# Allegro board RINGCOUNTER_EXAM.brd
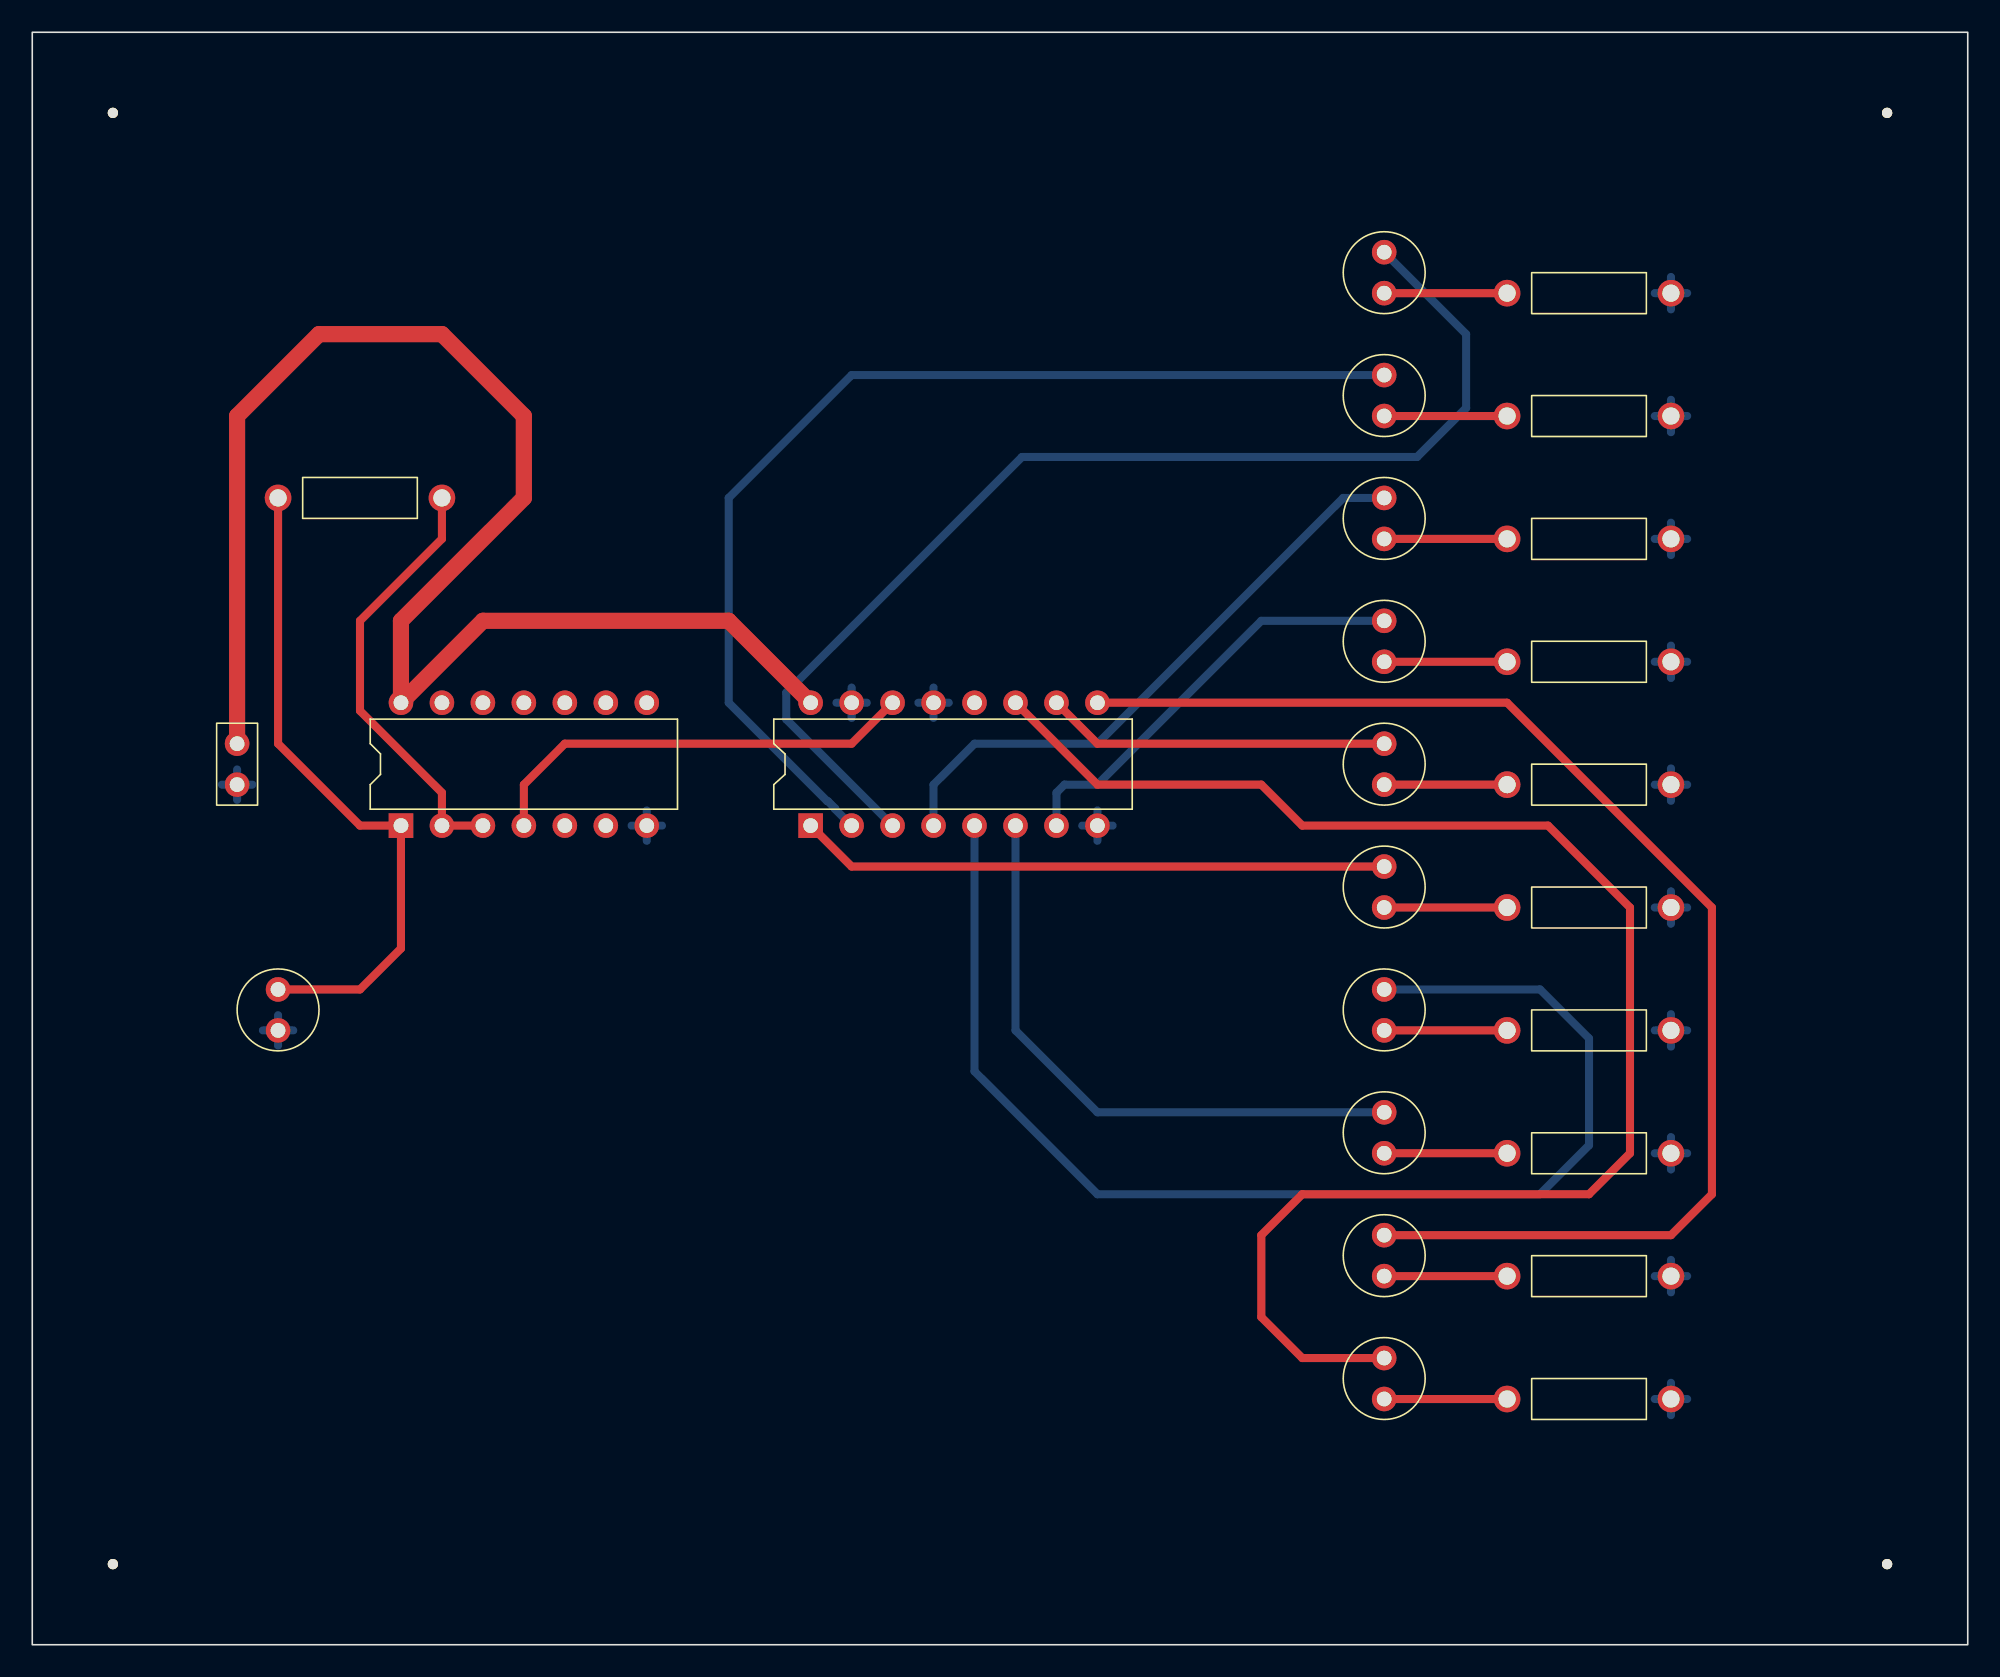
[diagram p0: board, top side]
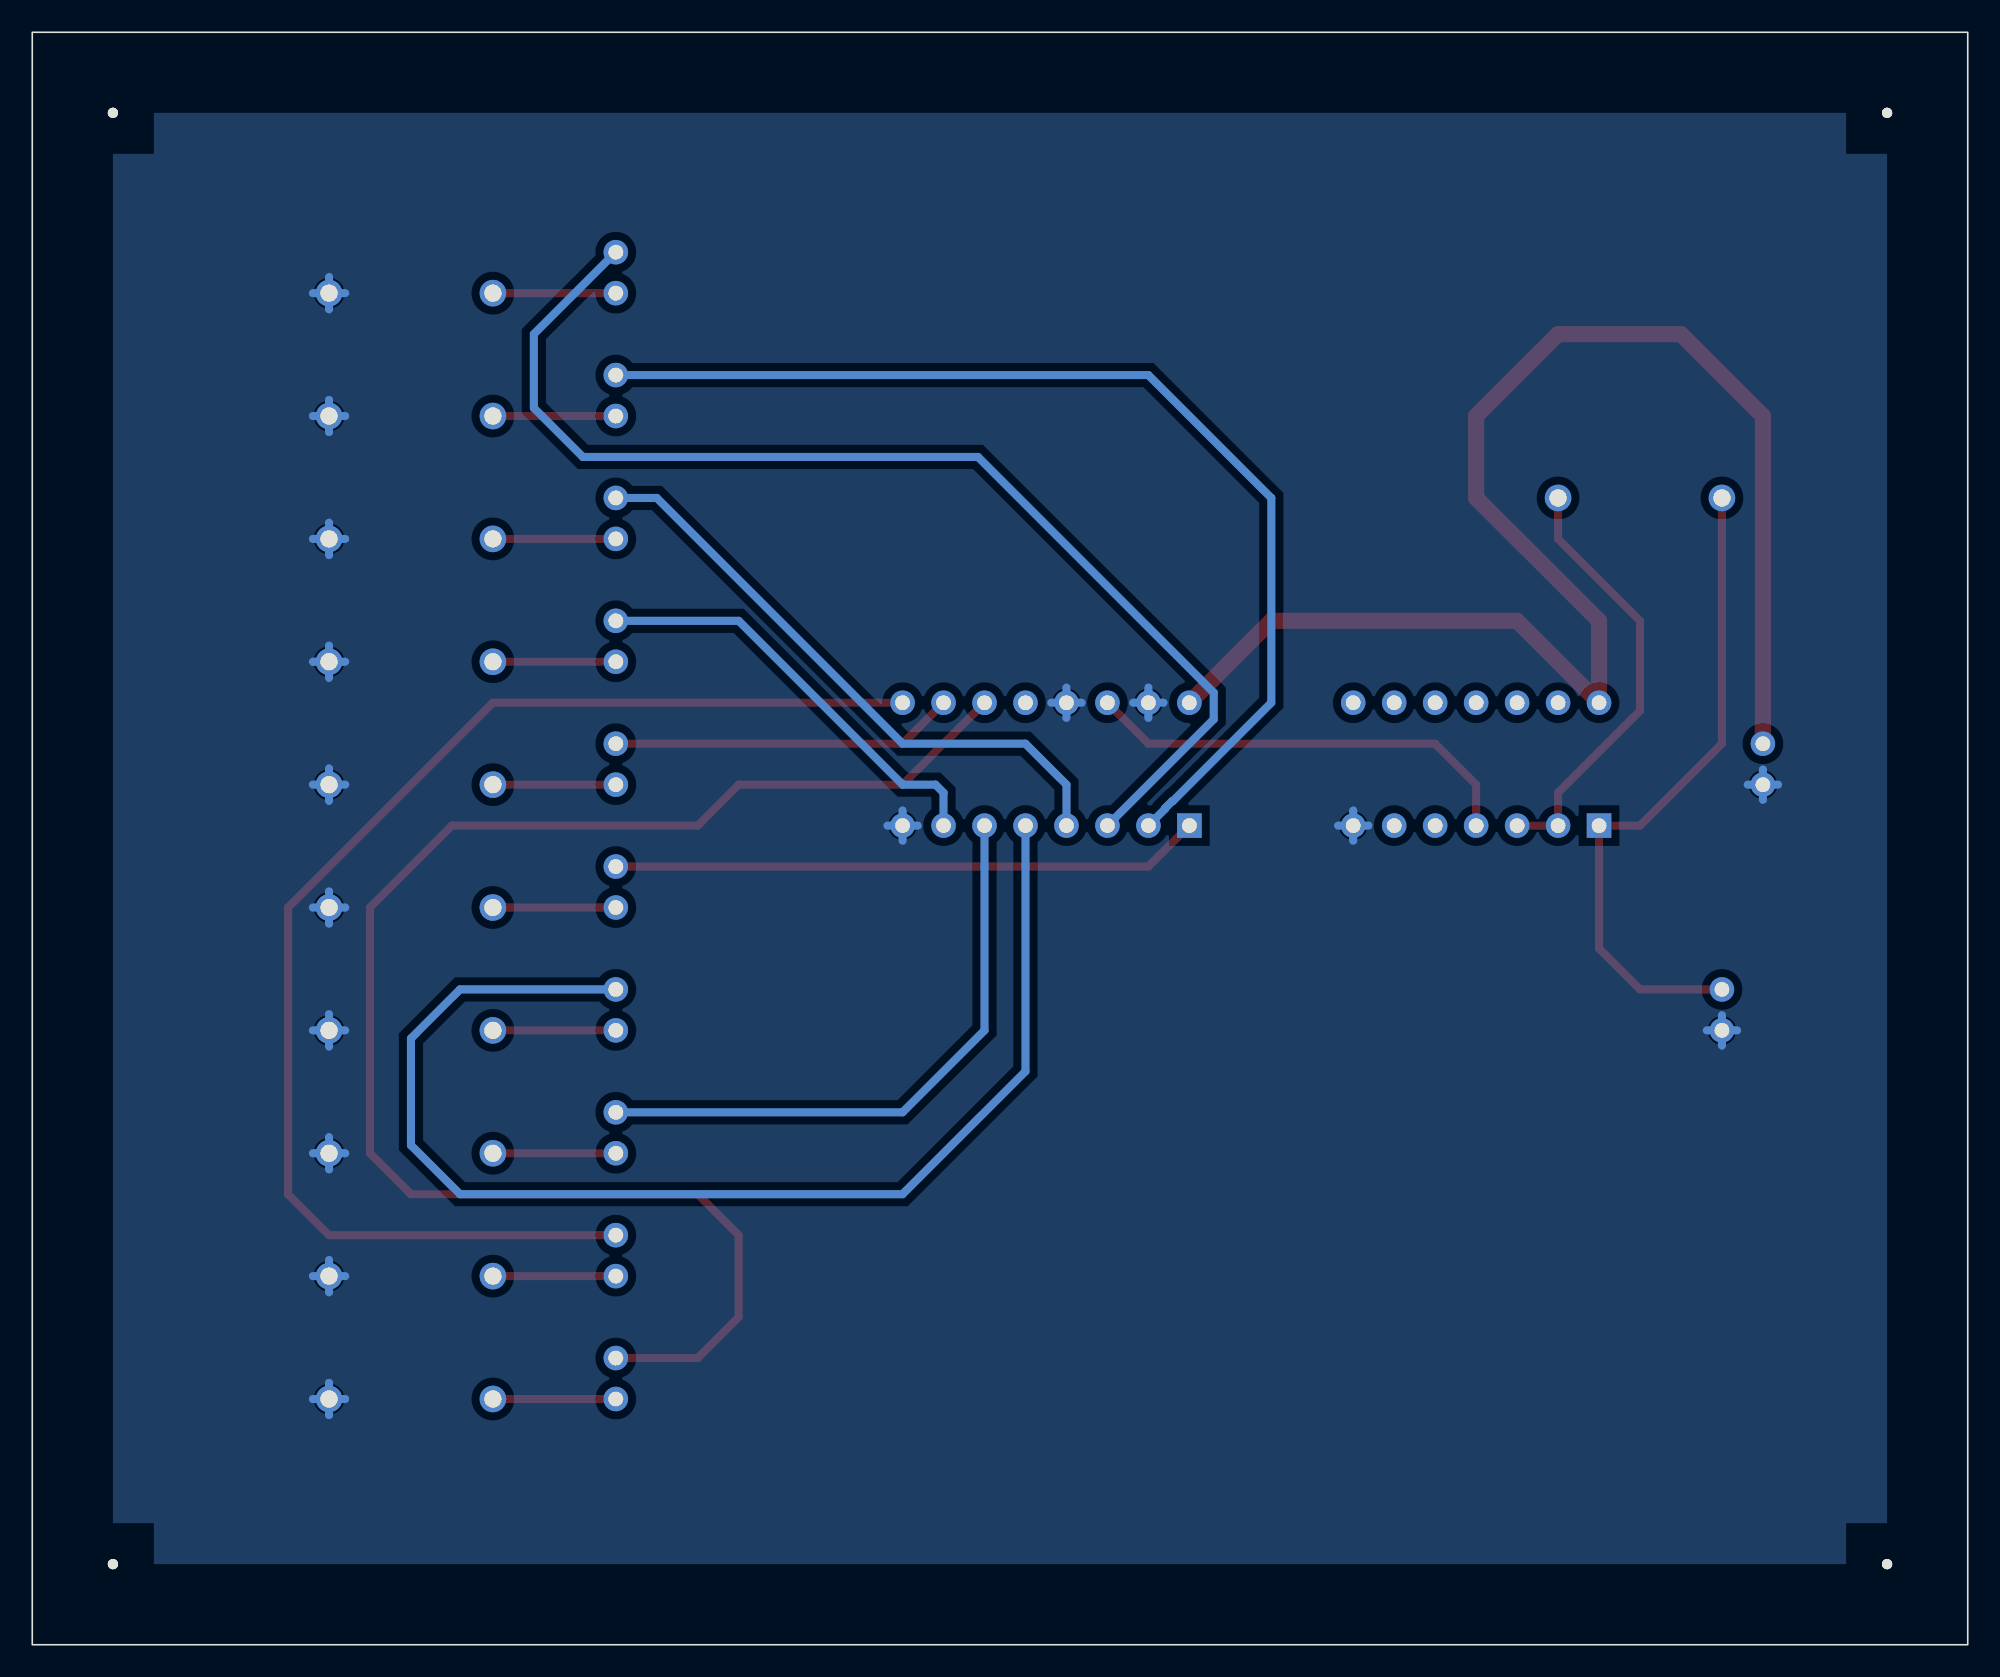
[diagram p1: board, bottom side, seen from below]

Outline 120 x 100 mm; copper layers: TOP, BOTTOM. Coordinates in mm from the lower left corner of the outline.
Outline path: rectangle 0,0 120,100

## Design rules (mm)
nets with their own width: min track width 1; nets GND VCC

## Placement (name value [footprint] x y rotation side)
C1  10u  [CAP196]  15.24 40.64 180 top
D1  LED  [CAP196]  83.82 83.82 0 top
D2  LED  [CAP196]  83.82 76.2 0 top
D3  LED  [CAP196]  83.82 68.58 0 top
D4  LED  [CAP196]  83.82 60.96 0 top
D5  LED  [CAP196]  83.82 53.34 0 top
D6  LED  [CAP196]  83.82 45.72 0 top
D7  LED  [CAP196]  83.82 38.1 0 top
D8  LED  [CAP196]  83.82 30.48 0 top
D9  LED  [CAP196]  83.82 22.86 0 top
D10  LED  [CAP196]  83.82 15.24 0 top
J1  CON2  [JUMPER2]  12.7 55.88 270 top
NOREF  -  []  2 2 90 top
NOREF#2  -  []  0 0 0 top
NOREF#3  -  []  2 98 0 top
NOREF#4  -  [unnamed#2]  5 95 0 top
NOREF#5  -  [unnamed#2]  115 95 0 top
NOREF#6  -  [unnamed#2]  115 5 0 top
NOREF#7  -  []  0 0 90 top
NOREF#8  -  [unnamed#2]  5 5 0 top
R1  220  [RES400]  91.44 83.82 270 top
R2  220  [RES400]  91.44 76.2 270 top
R3  200k  [RES400]  15.24 71.12 270 top
R4  220  [RES400]  91.44 68.58 270 top
R5  220  [RES400]  91.44 60.96 270 top
R6  220  [RES400]  91.44 53.34 270 top
R7  220  [RES400]  91.44 45.72 270 top
R8  220  [RES400]  91.44 38.1 270 top
R9  220  [RES400]  91.44 30.48 270 top
R10  220  [RES400]  91.44 22.86 270 top
R11  220  [RES400]  91.44 15.24 270 top
U1  74HC14  [DIP14_3]  22.86 50.8 90 top
U2  4017  [DIP16_3]  48.26 50.8 90 top

## Library data of the parts
C1 = CAP: Tolerance: ***; User Part Number: ***
D1-D10 = LED: Tolerance: ***; User Part Number: ***
J1 = CON2: User Part Number: ***
R1-R11 = R: Tolerance: ***; User Part Number: ***
U1 = 74HC14: Tolerance: ***; User Part Number: ***
U2 = 4017_0: Tolerance: ***; User Part Number: ***

## Footprints (pads in the part's own frame, mm; a bottom-side part is the same pattern mirrored in y, then rotated)
CAP196
  round 1.524 hole 0.914: 1(0,0) 2(0,2.54)
DIP14_3
  rect 1.524x1.524 hole 0.914: 1(0,0)
  round 1.524 hole 0.914: 2(0,-2.54) 3(0,-5.08) 4(0,-7.62) 5(0,-10.16) 6(0,-12.7) 7(0,-15.24) 8(7.62,-15.24) 9(7.62,-12.7) 10(7.62,-10.16) 11(7.62,-7.62) 12(7.62,-5.08) 13(7.62,-2.54) 14(7.62,0)
DIP16_3
  rect 1.524x1.524 hole 0.914: 1(0,0)
  round 1.524 hole 0.914: 2(0,-2.54) 3(0,-5.08) 4(0,-7.62) 5(0,-10.16) 6(0,-12.7) 7(0,-15.24) 8(0,-17.78) 9(7.62,-17.78) 10(7.62,-15.24) 11(7.62,-12.7) 12(7.62,-10.16) 13(7.62,-7.62) 14(7.62,-5.08) 15(7.62,-2.54) 16(7.62,0)
JUMPER2
  round 1.524 hole 0.914: 1(0,0) 2(2.54,0)
RES400
  round 1.651 hole 1.067: 1(0,0) 2(0,10.16)
unnamed#2
  round 0.635 hole 3.175 unplated: (0,0)

## Nets
GND: C1.2 J1.2 R1.2 R2.2 R4.2 R5.2 R6.2 R7.2 R8.2 R9.2 R10.2 R11.2 U1.7 U2.8(GND) U2.13(E\N\A\) U2.15(RST)
VCC: J1.1 U1.14 U2.16(VCC)
N01217: C1.1 R3.1 U1.1(A)
N01238: R3.2 U1.2(Y) U1.3(A)
N01257: U1.4(Y) U2.14(CLK)
N01261: D1.2(ANODE) U2.3(Q0)
N01273: D2.2(ANODE) U2.2(Q1)
N01285: D3.2(ANODE) U2.4(Q2)
N01297: D4.2(ANODE) U2.7(Q3)
N01309: D10.2(ANODE) U2.11(Q9)
N01321: D9.2(ANODE) U2.9(Q8)
N01333: D8.2(ANODE) U2.6(Q7)
N01345: D7.2(ANODE) U2.5(Q6)
N01357: D6.2(ANODE) U2.1(Q5)
N01369: D5.2(ANODE) U2.10(Q4)
N01464: D1.1(CATHODE) R1.1
N01468: D2.1(CATHODE) R2.1
N01472: D3.1(CATHODE) R4.1
N01476: D4.1(CATHODE) R5.1
N01480: D5.1(CATHODE) R6.1
N01484: D6.1(CATHODE) R7.1
N01488: D7.1(CATHODE) R8.1
N01492: D8.1(CATHODE) R9.1
N01503: D9.1(CATHODE) R10.1
N01507: D10.1(CATHODE) R11.1

Pads without a net: U1 5 6 8 9 10 11 12 13; U2 12

## Routing (per net, layer and track width the routed paths; a pad name or vN(x,y) marks a point on that pad's centre or on a via; arc(x,y) is an arc through that point)
GND: length 62.7
  BOTTOM w0.5: 101.6,82.82 R1.2 ; R1.2 101.6,84.82 ; R1.2 102.6,83.82 ; R1.2 100.6,83.82 ; R7.2 101.6,46.72 ; R7.2 102.6,45.72 ; R7.2 101.6,44.72 ; R7.2 100.6,45.72 ; 50.8,57.48 U2.15 ; U2.15 49.86,58.42 ; U2.15 50.8,59.36 ; U2.15 51.74,58.42 ; 101.6,52.34 R6.2 ; R6.2 100.6,53.34 ; R6.2 101.6,54.34 ; R6.2 102.6,53.34 ; 101.6,29.48 R9.2 ; R9.2 101.6,31.48 ; R9.2 100.6,30.48 ; R9.2 102.6,30.48 ; R10.2 102.6,22.86 ; R10.2 100.6,22.86 ; R10.2 101.6,23.86 ; R10.2 101.6,21.86 ; R2.2 102.6,76.2 ; R2.2 101.6,77.2 ; R2.2 101.6,75.2 ; R2.2 100.6,76.2 ; J1.2 12.7,54.28 ; J1.2 12.7,52.4 ; J1.2 13.64,53.34 ; J1.2 11.76,53.34 ; R4.2 101.6,69.58 ; R4.2 102.6,68.58 ; R4.2 100.6,68.58 ; R4.2 101.6,67.58 ; R5.2 101.6,61.96 ; R5.2 102.6,60.96 ; R5.2 100.6,60.96 ; R5.2 101.6,59.96 ; 38.1,49.86 U1.7 ; U1.7 39.04,50.8 ; U1.7 38.1,51.74 ; U1.7 37.16,50.8 ; R8.2 102.6,38.1 ; R8.2 100.6,38.1 ; R8.2 101.6,37.1 ; R8.2 101.6,39.1 ; 54.94,58.42 U2.13 ; U2.13 55.88,57.48 ; U2.13 56.82,58.42 ; U2.13 55.88,59.36 ; 15.24,37.16 C1.2 ; C1.2 16.18,38.1 ; C1.2 15.24,39.04 ; C1.2 14.3,38.1 ; R11.2 102.6,15.24 ; R11.2 100.6,15.24 ; R11.2 101.6,14.24 ; R11.2 101.6,16.24 ; U2.8 66.04,51.74 ; U2.8 66.04,49.86 ; U2.8 66.98,50.8 ; U2.8 65.1,50.8
VCC: length 92.9
  TOP w1: J1.1 12.7,76.2 17.78,81.28 25.4,81.28 30.48,76.2 30.48,71.12 22.86,63.5 U1.14 27.94,63.5 43.18,63.5 U2.16
N01217: length 41.3
  TOP w0.5: C1.1 20.32,40.64 22.86,43.18 U1.1 20.32,50.8 15.24,55.88 R3.1
N01238: length 27.1
  TOP w0.5: R3.2 25.4,68.58 20.32,63.5 20.32,57.92 25.4,52.84 U1.2 U1.3
N01257: length 27.5
  TOP w0.5: U2.14 50.8,55.88 33.02,55.88 30.48,53.34 U1.4
N01261: length 72.2
  BOTTOM w0.5: D1.2 88.9,81.28 88.9,76.7 85.86,73.66 61.36,73.66 46.75,59.05 46.75,57.39 U2.3
N01273: length 67.3
  BOTTOM w0.5: U2.2 49.77,51.83 49.77,51.87 49.33,52.31 49.29,52.31 43.18,58.42 43.18,71.12 50.8,78.74 D2.2
N01285: length 37.8
  BOTTOM w0.5: U2.4 55.88,53.34 58.42,55.88 66.04,55.88 81.28,71.12 D3.2
N01297: length 26.8
  BOTTOM w0.5: D4.2 76.2,63.5 66.04,53.34 64,53.34 63.5,52.84 U2.7
N01309: length 97.3
  TOP w0.5: U2.11 66.04,53.34 76.2,53.34 78.74,50.8 93.98,50.8 99.06,45.72 99.06,30.48 96.52,27.94 78.74,27.94 76.2,25.4 76.2,20.32 78.74,17.78 D10.2
N01321: length 82.5
  TOP w0.5: D9.2 101.6,25.4 104.14,27.94 104.14,45.72 91.44,58.42 U2.9
N01333: length 37.7
  BOTTOM w0.5: D8.2 66.04,33.02 60.96,38.1 U2.6
N01345: length 78.3
  BOTTOM w0.5: D7.2 93.48,40.64 96.52,37.6 96.52,30.98 93.48,27.94 66.04,27.94 58.42,35.56 U2.5
N01357: length 36.6
  TOP w0.5: D6.2 50.8,48.26 U2.1
N01369: length 21.4
  TOP w0.5: U2.10 66.04,55.88 D5.2
N01464: length 7.6
  TOP w0.5: D1.1 R1.1
N01468: length 7.6
  TOP w0.5: D2.1 R2.1
N01472: length 7.6
  TOP w0.5: D3.1 R4.1
N01476: length 7.6
  TOP w0.5: D4.1 R5.1
N01480: length 7.6
  TOP w0.5: D5.1 R6.1
N01484: length 7.6
  TOP w0.5: D6.1 R7.1
N01488: length 7.6
  TOP w0.5: D7.1 R8.1
N01492: length 7.6
  TOP w0.5: D8.1 R9.1
N01503: length 7.6
  TOP w0.5: D9.1 R10.1
N01507: length 7.6
  TOP w0.5: D10.1 R11.1

## Copper pours and planes (outline as drawn; the poured copper is in the pictures)
GND on BOTTOM: 5,5 5,95 115,95 115,5

## Text on the board
DIMENSION: FIGURE | SIZE | 0.9144 | 1.0668 | 3.175 | DRILL CHART: TOP to BOTTOM | ALL UNITS ARE IN MILLIMETERS | PLATED | NON-PLATED | QTY | 54 | 22 | 4
